# EAGLE board Lynx Disk Controller 10B (EAGLE 7.5.0)
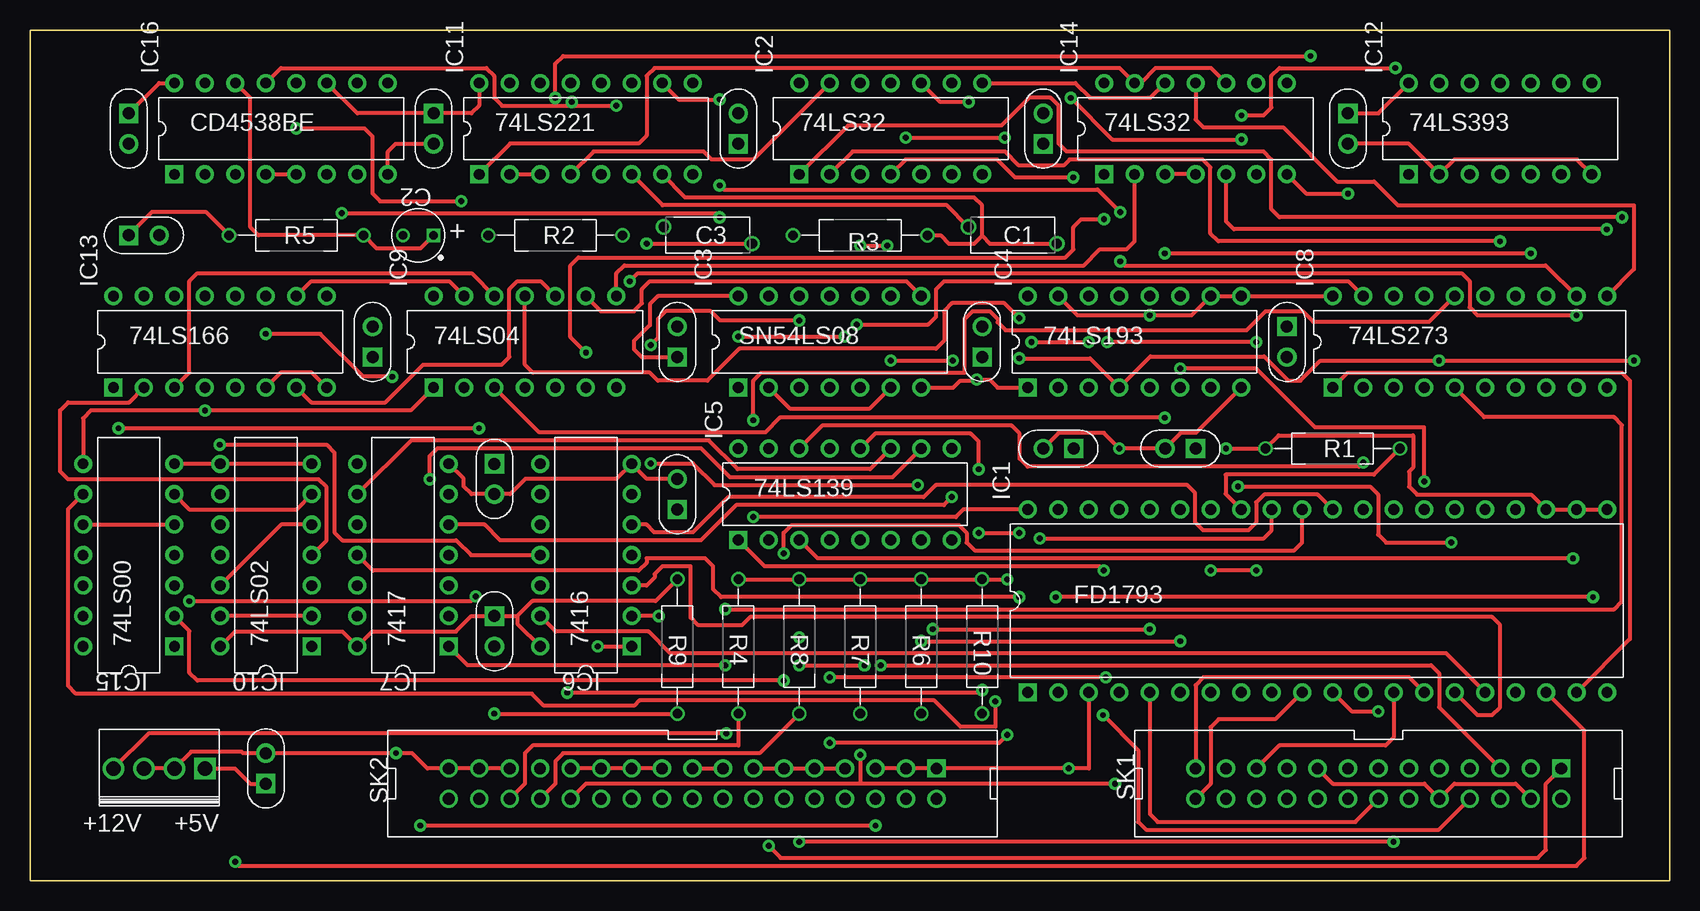
[diagram p0: board, top side]
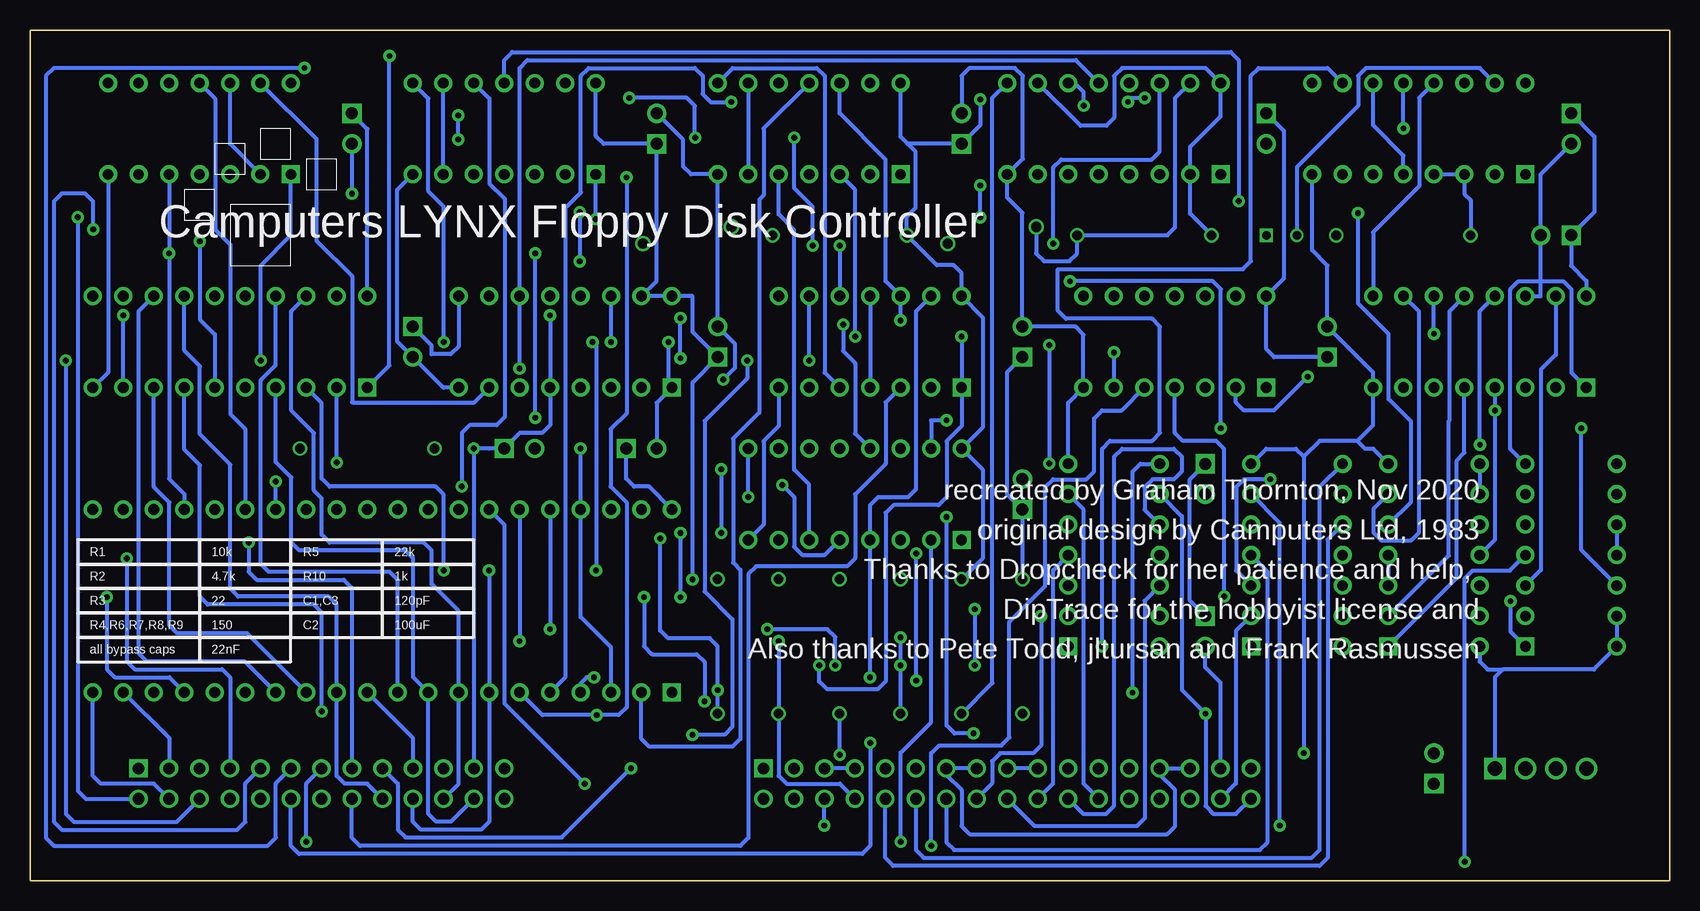
[diagram p1: board, bottom side, seen from below]

Size 136.65 x 70.95 mm. Coordinates in mm from the lower left corner, seen from the top.
Outline: 0,70.95 136.65,70.95 136.65,0 0,0 0,70.95
Copper layers (1*16): Top 0.035mm / dielectric 1.5mm / Bottom 0.035mm
Design rules "default *": minimum track width 10mil, minimum drill 0.61mm, track to track 8mil, track to pad 8mil, pad to pad 8mil, via to via 8mil, smd to smd 8mil, copper to edge 40mil, drill to drill 8mil, minimum pad ring 0mil, minimum via ring 8mil, stop-mask expansion 2mil, vias tented up to drill 19mil, thermal gap 10mil
Net classes: 0 Default: width 0.33 mm, clearance 0.33 mm

## Footprints (pad centres in the part's own frame; a part is rotated, then mirrored left to right if it is on the bottom)
CAPRB736W60L700T300H1000_AD2 = drill 0.85 pad 1.28: 1 -3.684,0.7; 2 3.684,-0.7
CAPPRD254W51D440H711 = drill 0.71 pad 1.11 square: 1 -1.27,0 | drill 0.71 pad 1.11: 2 1.27,0
CAP-2.54/6.6x3 = drill 1 pad 1.6 square: 1 -1.27,0 | drill 1 pad 1.6: 2 1.27,0
DIP-40/600mil = drill 0.9 pad 1.5 square: 1 -7.62,24.13 | drill 0.9 pad 1.5: 2 -7.62,21.59; 3 -7.62,19.05; 4 -7.62,16.51; 5 -7.62,13.97; 6 -7.62,11.43; 7 -7.62,8.89; 8 -7.62,6.35; 9 -7.62,3.81; 10 -7.62,1.27; 11 -7.62,-1.27; 12 -7.62,-3.81; 13 -7.62,-6.35; 14 -7.62,-8.89; 15 -7.62,-11.43; 16 -7.62,-13.97; 17 -7.62,-16.51; 18 -7.62,-19.05; 19 -7.62,-21.59; 20 -7.62,-24.13; 21 7.62,-24.13; 22 7.62,-21.59; 23 7.62,-19.05; 24 7.62,-16.51; 25 7.62,-13.97; 26 7.62,-11.43; 27 7.62,-8.89; 28 7.62,-6.35; 29 7.62,-3.81; 30 7.62,-1.27; 31 7.62,1.27; 32 7.62,3.81; 33 7.62,6.35; 34 7.62,8.89; 35 7.62,11.43; 36 7.62,13.97; 37 7.62,16.51; 38 7.62,19.05; 39 7.62,21.59; 40 7.62,24.13
DIP-14_IC9 = drill 0.9 pad 1.5 square: 1 -3.81,7.62 | drill 0.9 pad 1.5: 2 -3.81,5.08; 3 -3.81,2.54; 4 -3.81,0; 5 -3.81,-2.54; 6 -3.81,-5.08; 7 -3.81,-7.62; 8 3.81,-7.62; 9 3.81,-5.08; 10 3.81,-2.54; 11 3.81,0; 12 3.81,2.54; 13 3.81,5.08; 14 3.81,7.62
DIP-16 = drill 0.9 pad 1.5 square: 1 -3.81,8.89 | drill 0.9 pad 1.5: 2 -3.81,6.35; 3 -3.81,3.81; 4 -3.81,1.27; 5 -3.81,-1.27; 6 -3.81,-3.81; 7 -3.81,-6.35; 8 -3.81,-8.89; 9 3.81,-8.89; 10 3.81,-6.35; 11 3.81,-3.81; 12 3.81,-1.27; 13 3.81,1.27; 14 3.81,3.81; 15 3.81,6.35; 16 3.81,8.89
DIP-14 = drill 0.9 pad 1.5 square: 1 -3.81,7.62 | drill 0.9 pad 1.5: 2 -3.81,5.08; 3 -3.81,2.54; 4 -3.81,0; 5 -3.81,-2.54; 6 -3.81,-5.08; 7 -3.81,-7.62; 8 3.81,-7.62; 9 3.81,-5.08; 10 3.81,-2.54; 11 3.81,0; 12 3.81,2.54; 13 3.81,5.08; 14 3.81,7.62
DIP-20 = drill 0.9 pad 1.5 square: 1 -3.81,11.43 | drill 0.9 pad 1.5: 2 -3.81,8.89; 3 -3.81,6.35; 4 -3.81,3.81; 5 -3.81,1.27; 6 -3.81,-1.27; 7 -3.81,-3.81; 8 -3.81,-6.35; 9 -3.81,-8.89; 10 -3.81,-11.43; 11 3.81,-11.43; 12 3.81,-8.89; 13 3.81,-6.35; 14 3.81,-3.81; 15 3.81,-1.27; 16 3.81,1.27; 17 3.81,3.81; 18 3.81,6.35; 19 3.81,8.89; 20 3.81,11.43
22112042 = drill 1.2 pad 1.8 square: 1 -3.81,0 | drill 1.2 pad 1.8: 2 -1.27,0; 3 1.27,0; 4 3.81,0
RESAD1120W55L680D260 = drill 0.8 pad 1.2: 1 -5.6,0; 2 5.6,0
RESAD1120W55L680D260_R3 = drill 0.8 pad 1.2: 1 -5.6,0; 2 5.6,0
IDC26M = drill 0.965 pad 1.524 square: 1 15.24,1.27 | drill 0.965 pad 1.524: 2 15.24,-1.27; 3 12.7,1.27; 4 12.7,-1.27; 5 10.16,1.27; 6 10.16,-1.27; 7 7.62,1.27; 8 7.62,-1.27; 9 5.08,1.27; 10 5.08,-1.27; 11 2.54,1.27; 12 2.54,-1.27; 13 0,1.27; 14 0,-1.27; 15 -2.54,1.27; 16 -2.54,-1.27; 17 -5.08,1.27; 18 -5.08,-1.27; 19 -7.62,1.27; 20 -7.62,-1.27; 21 -10.16,1.27; 22 -10.16,-1.27; 23 -12.7,1.27; 24 -12.7,-1.27; 25 -15.24,1.27; 26 -15.24,-1.27
IDC34M = drill 0.965 pad 1.524 square: 1 20.32,1.27 | drill 0.965 pad 1.524: 2 20.32,-1.27; 3 17.78,1.27; 4 17.78,-1.27; 5 15.24,1.27; 6 15.24,-1.27; 7 12.7,1.27; 8 12.7,-1.27; 9 10.16,1.27; 10 10.16,-1.27; 11 7.62,1.27; 12 7.62,-1.27; 13 5.08,1.27; 14 5.08,-1.27; 15 2.54,1.27; 16 2.54,-1.27; 17 0,1.27; 18 0,-1.27; 19 -2.54,1.27; 20 -2.54,-1.27; 21 -5.08,1.27; 22 -5.08,-1.27; 23 -7.62,1.27; 24 -7.62,-1.27; 25 -10.16,1.27; 26 -10.16,-1.27; 27 -12.7,1.27; 28 -12.7,-1.27; 29 -15.24,1.27; 30 -15.24,-1.27; 31 -17.78,1.27; 32 -17.78,-1.27; 33 -20.32,1.27; 34 -20.32,-1.27

## Placement (x,y rotation side)
C1  HBZ820MBBCF0KR  [CAPRB736W60L700T300H1000_AD2]  81.89,53.83 0 top
C2  199D104X0035A1V1E3  [CAPPRD254W51D440H711]  32.36,53.83 180 top
C3  HBZ820MBBCF0KR  [CAPRB736W60L700T300H1000_AD2]  56.49,53.83 0 top
C4  CAP  [CAP-2.54/6.6x3]  19.66,9.38 90 top
C5  CAP  [CAP-2.54/6.6x3]  8.23,62.72 270 top
C6  CAP  [CAP-2.54/6.6x3]  33.63,62.72 270 top
C7  CAP  [CAP-2.54/6.6x3]  59.03,62.72 90 top
C8  CAP  [CAP-2.54/6.6x3]  84.43,62.72 90 top
C9  CAP  [CAP-2.54/6.6x3]  109.83,62.72 270 top
C10  CAP  [CAP-2.54/6.6x3]  104.75,44.94 270 top
C11  CAP  [CAP-2.54/6.6x3]  79.35,44.94 90 top
C12  CAP  [CAP-2.54/6.6x3]  53.95,44.94 90 top
C13  CAP  [CAP-2.54/6.6x3]  28.55,44.94 90 top
C14  CAP  [CAP-2.54/6.6x3]  9.5,53.83 0 top
C15  CAP  [CAP-2.54/6.6x3]  95.86,36.05 180 top
C16  CAP  [CAP-2.54/6.6x3]  38.71,33.51 270 top
C17  CAP  [CAP-2.54/6.6x3]  38.71,20.81 270 top
C18  CAP  [CAP-2.54/6.6x3]  53.95,32.24 90 top
C19  CAP  [CAP-2.54/6.6x3]  85.7,36.05 180 top
IC1  FD1793-02AL  [DIP-40/600mil]  107.29,23.35 90 top
IC2  SN74LS32N  [DIP-14_IC9]  71.73,62.72 90 top
IC3  SN74LS08N  [DIP-14_IC9]  66.65,44.94 90 top
IC4  SN74LS193N  [DIP-16]  92.05,44.94 90 top
IC5  SN74LS139N  [DIP-16]  67.92,32.24 90 top
IC6  DM7416N  [DIP-14]  46.33,27.16 180 top
IC7  SN7417N  [DIP-14]  31.09,27.16 180 top
IC8  SN74LS273N  [DIP-20]  119.99,44.94 90 top
IC9  SN74LS04N  [DIP-14_IC9]  41.25,44.94 90 top
IC10  SN74LS02N  [DIP-14]  19.66,27.16 180 top
IC11  SN74LS221N  [DIP-16]  46.33,62.72 90 top
IC12  SN74LS393N  [DIP-14_IC9]  122.53,62.72 90 top
IC13  DM74LS166N  [DIP-16]  15.85,44.94 90 top
IC14  SN74LS32N  [DIP-14_IC9]  97.13,62.72 90 top
IC15  SN74LS00N  [DIP-14]  8.23,27.16 180 top
IC16  MC14538BCP  [DIP-16]  20.93,62.72 90 top
PWR  22112042  [22112042]  10.77,9.38 180 top
R1  CFR-25JB-52-1K  [RESAD1120W55L680D260]  108.56,36.05 0 top
R2  CFR-25JB-52-1K  [RESAD1120W55L680D260]  43.79,53.83 0 top
R3  CFR-25JB-52-1K  [RESAD1120W55L680D260_R3]  69.19,53.83 180 top
R4  CFR-25JB-52-1K  [RESAD1120W55L680D260]  59.03,19.54 270 top
R5  CFR-25JB-52-1K  [RESAD1120W55L680D260]  22.2,53.83 0 top
R6  CFR-25JB-52-1K  [RESAD1120W55L680D260]  74.27,19.54 270 top
R7  CFR-25JB-52-1K  [RESAD1120W55L680D260]  69.19,19.54 270 top
R8  CFR-25JB-52-1K  [RESAD1120W55L680D260]  64.11,19.54 270 top
R9  CFR-25JB-52-1K  [RESAD1120W55L680D260]  53.95,19.54 270 top
R10  CFR-25JB-52-1K  [RESAD1120W55L680D260]  79.35,19.54 270 top
SK1  IDC2X13M  [IDC26M]  112.37,8.11 0 top
SK2  IDC2X17M  [IDC34M]  55.22,8.11 0 top

## Library data of the parts
C1 C3 = common; DATASHEET: http://datasheets.diptrace.com/vishay/HBZ.pdf; MANUFACTURER: Vishay; PART_NUMBER_(DIGI-KEY): HBZ820MBBCF0KR-ND; UNIQUE_NAME: VISHAY_HBZ_7.5X1.4_7X3_CAP
C2 = common; DATASHEET: http://datasheets.diptrace.com/vishay/199D.pdf; MANUFACTURER: Vishay; PART_NUMBER_(DIGI-KEY): 199D104X0035A1V1E3-ND; UNIQUE_NAME: VISHAY_199D_A1_CAPP
C4-C19 PWR SK1 SK2 = common
IC1 = common; MANUFACTURER: Western Digital
IC2 IC14 = common; DATASHEET: http://datasheets.diptrace.com/ti/SN5432.pdf; MANUFACTURER: Texas Instruments
IC3 = common; DATASHEET: http://datasheets.diptrace.com/ti/SN5408.pdf; MANUFACTURER: Texas Instruments
IC4 IC5 IC8 IC12 IC16 = common; MANUFACTURER: ON Semiconductor
IC6 = common; DATASHEET: http://datasheets.diptrace.com/fairchild/DM7416.pdf; MANUFACTURER: Fairchild
IC7 = common; DATASHEET: http://datasheets.diptrace.com/ti/SN5407_5417.pdf; MANUFACTURER: Texas Instruments
IC9 = common; MANUFACTURER: Motorola
IC10 = common; DATASHEET: http://datasheets.diptrace.com/ti/SN5402.pdf; MANUFACTURER: Texas Instruments
IC11 = common; DATASHEET: http://datasheets.diptrace.com/ti/SN54221.pdf; MANUFACTURER: Texas Instruments
IC13 = common; DATASHEET: http://datasheets.diptrace.com/fairchild/DM74LS166.pdf; MANUFACTURER: Fairchild
IC15 = common; DATASHEET: http://datasheets.diptrace.com/ti/SN5400.pdf; MANUFACTURER: Texas Instruments
R1-R10 = common; DATASHEET: http://datasheets.diptrace.com/yageo/cfr.pdf; MANUFACTURER: Yageo; PART_NUMBER_(DIGI-KEY): 1.0KQBK-ND; UNIQUE_NAME: YAGEO_CFR-25

## Nets
Net_0: IC6.1 IC16.10
Net_1: IC8.9 IC15.12
Net_2: IC15.5 IC15.10 IC15.11
Net_3: C4.1 C5.1 C6.1 C7.1 C8.1 C9.1 C10.1 C11.1 C12.1 C13.1 C14.1 C15.1 C16.1 C17.1 C18.1 IC1.21 IC1.22 IC1.23 IC2.14 IC3.14 IC4.5 IC4.9 IC4.10 IC4.15 IC4.16 IC5.16 IC6.14 IC7.14 IC8.20 IC9.14 IC10.14 IC11.2 IC11.3 IC11.10 IC11.16 IC12.14 IC13.16 IC14.14 IC15.13 IC15.14 IC16.3 IC16.4 IC16.5 IC16.11 IC16.16 PWR.1 R1.1 R2.1 R3.2 R4.1 R5.1 R6.1 R7.1 R8.1 R9.1 R10.1 SK1.23
Net_4: IC2.2 IC8.6
Net_5: C2.1 IC16.14 R5.2
Net_6: IC1.19 IC8.1 IC11.11 IC13.9 IC16.13 SK1.3
Net_7: IC8.11 IC14.11 IC16.12
Net_8: IC2.3 IC3.1 SK1.5
Net_9: IC2.13 IC11.4
Net_10: IC11.1 IC14.10 IC14.13 SK1.15
Net_11: IC2.8 IC3.5 IC14.12
Net_12: IC9.4 IC15.1
Net_13: IC2.12 IC3.12 IC5.5
Net_14: IC9.13 IC10.6 IC13.10 IC15.6
Net_15: C4.2 C5.2 C6.2 C7.2 C8.2 C9.2 C10.2 C11.2 C12.2 C13.2 C14.2 C15.2 C16.2 C17.2 C18.2 C19.2 IC1.3 IC1.20 IC1.37 IC2.7 IC3.7 IC4.1 IC4.8 IC4.14 IC5.8 IC6.7 IC7.7 IC8.10 IC9.7 IC10.7 IC10.8 IC10.9 IC11.8 IC12.2 IC12.7 IC12.12 IC13.1 IC13.6 IC13.8 IC13.14 IC14.7 IC15.7 IC16.8 PWR.2 PWR.3 SK1.4 SK1.10 SK1.17 SK2.1 SK2.3 SK2.5 SK2.7 SK2.9 SK2.11 SK2.13 SK2.15 SK2.17 SK2.19 SK2.21 SK2.23 SK2.25 SK2.27 SK2.29 SK2.31 SK2.33
Net_16: IC9.1 IC10.11 IC13.4 IC15.8
Net_17: C1.2 IC11.7 R3.1
Net_18: IC1.6 IC2.4 SK1.8
Net_19: IC2.6 IC2.9
Net_20: IC3.8 IC9.9
Net_21: IC9.6 IC14.1
Net_22: IC9.8 IC14.2
Net_23: IC14.3 IC14.4
Net_24: IC14.6 IC14.9
Net_25: IC5.1 IC14.8
Net_26: IC4.4 IC9.11 IC12.1 SK1.6
Net_27: IC5.14 IC8.2
Net_28: IC10.1 IC13.5
Net_29: IC1.4 IC3.13 IC5.4
Net_30: IC10.3 IC10.4 IC13.2
Net_31: IC8.12 IC10.5 IC10.12
Net_32: IC9.12 IC13.3
Net_33: IC9.10 IC13.7
Net_34: IC9.2 IC13.11
Net_35: IC3.2 IC3.6
Net_36: IC3.4 IC3.11
Net_37: IC7.1 IC8.5
Net_38: IC5.15 IC8.16
Net_39: IC5.13 IC8.19
Net_40: IC5.10 IC7.3
Net_41: IC5.9 IC7.5
Net_42: IC5.11 IC7.9
Net_43: IC5.12 IC7.11
Net_44: C1.1 IC11.6
Net_45: C3.1 IC11.15 R2.2
Net_46: C3.2 IC11.14
Net_47: IC10.2 IC10.13 IC13.12
Net_48: IC1.32 IC6.8 R10.2
Net_49: IC1.27 IC4.11 IC11.12
Net_50: IC4.7 IC12.13
Net_51: IC13.15 IC15.3
Net_52: IC1.26 IC12.11
Net_53: IC1.5 IC2.10 SK1.14
Net_54: IC3.3 SK1.16
Net_55: IC1.7 IC8.3 SK1.20
Net_56: IC1.8 IC8.18 SK1.22
Net_57: IC1.9 IC8.4 SK1.24
Net_58: IC1.10 IC8.17 SK1.26
Net_59: IC1.11 IC8.7 SK1.19
Net_60: IC1.12 IC8.14 SK1.18
Net_61: IC1.13 IC8.8 SK1.21
Net_62: IC5.2 SK1.13
Net_63: IC1.15 IC6.3
Net_64: IC1.16 IC6.13
Net_65: IC1.18 IC15.4
Net_66: IC1.17 IC15.9
Net_67: IC6.11 IC13.13
Net_68: IC1.24 IC9.3 IC12.5
Net_69: IC1.30 IC6.5
Net_70: IC1.31 IC15.2
Net_71: IC1.33 R1.2
Net_72: IC1.34 R7.2 SK2.26
Net_73: IC1.35 R6.2 SK2.8
Net_74: IC1.36 R8.2 SK2.28
Net_75: C19.1 IC1.40 PWR.4
Net_76: IC14.5 SK1.9
Net_77: IC11.9 R4.2 SK2.30
Net_78: IC9.5 SK1.1
Net_79: IC7.2 SK2.32
Net_80: IC7.4 SK2.14
Net_81: IC7.6 SK2.6
Net_82: IC7.10 SK2.10
Net_83: IC6.2 SK2.16
Net_84: IC6.4 SK2.20
Net_85: IC6.6 SK2.24
Net_86: IC6.9 R9.2 SK2.34
Net_87: IC6.10 SK2.22
Net_88: IC6.12 SK2.18
Net_89: IC5.3 SK1.7
Net_90: IC3.9 SK1.12
Net_91: IC3.10 SK1.11
Net_92: IC1.14 IC8.13 SK1.25
Net_93: IC2.1 SK1.2
Net_94: IC7.8 SK2.12
Net_95: IC2.5 IC5.6
Net_96: IC1.2 IC2.11
Net_97: C2.2 IC16.15

## Tracks (layer width: path | path; a pad name or v marks a point on that pad's centre or on a via)
Net_0  (via drill 0.49 pad 1.02)
  Top 0.33: v47.32,19.54 IC6.1
  Bottom 0.33: v47.32,19.54 47.32,36.03 46.66,36.69 43.15,36.69 42.49,37.35 42.49,46.21 43.15,46.87 50.33,46.87 50.99,47.53 50.99,51 35.58,51 34.92,51.66 34.92,67.12 34.26,67.78 28.52,67.78 IC16.10
Net_1  (via drill 0.49 pad 1.02)
  Top 0.33: v49.99,50 50.65,50.66 119.3,50.66 119.96,50 119.96,47.82 120.62,47.16 v128.88,47.16 | v7.38,37.74 v37.41,37.74
  Bottom 0.33: IC8.9 v128.88,47.16 | v37.41,37.74 37.41,49.34 38.07,50 v49.99,50 | IC15.12 7.38,27.58 v7.38,37.74
Net_2
  Top 0.33: IC15.10 IC15.5
  Bottom 0.33: IC15.10 IC15.11
Net_3  (via drill 0.49 pad 1.02)
  Top 0.33: v99.67,36.05 R1.1 104.05,37.15 115.25,37.15 115.25,34.46 114.93,34.14 114.93,32.88 115.59,32.22 125.09,32.22 IC1.23 IC1.22 IC1.21 | R9.1 52.13,23.33 41.86,23.33 40.61,22.08 | 40.61,22.08 40.61,21.45 IC6.14 | IC3.14 52.31,48.75 51.65,48.09 51.65,46.34 50.33,45.02 50.33,44.33 50.99,43.67 C12.1 | IC11.16 37.44,64.65 36.78,63.99 C6.1 27.28,63.99 IC16.11 | IC10.14 17.09,20.79 26.03,20.79 IC7.14 28.52,20.79 35.49,20.79 36.79,22.08 C17.1 40.61,22.08 | C9.1 112.37,63.99 IC12.14 | IC4.15 87.28,47.16 v93.32,47.16 96.81,47.16 IC4.10 IC4.9 IC8.20 | C5.1 10.77,66.53 IC16.16 | PWR.1 17.07,9.38 18.34,8.11 C4.1 | C14.1 10.18,55.79 14.64,55.79 R5.1 | IC11.10 54.06,65.15 v57.47,65.15 | R4.1 R8.1 R7.1 R6.1 R10.1 v81.45,25.14 | IC11.2 IC11.3 | IC16.4 IC16.5
  Bottom 0.33: IC15.13 IC15.14 6.32,17.64 13.92,17.64 | v81.45,25.14 81.45,41.57 C11.1 81.45,45.77 81.45,48.75 IC4.16 IC4.15 84.43,50.02 C8.1 88.85,61.45 89.51,62.11 IC14.14 | R4.1 57.22,26.95 57.22,34.25 IC5.16 57.22,37.86 57.22,46.95 IC3.14 59.03,50.68 59.69,51.34 61.09,51.34 R3.2 63.59,55.4 62.86,56.13 62.86,60.79 63.52,61.45 | C13.1 32.97,43.67 33.63,44.33 IC9.14 32.14,50.24 32.14,62.5 C6.1 | IC16.5 22.2,60.47 24.74,63.01 IC16.11 | R2.1 39.98,55.62 IC11.2 39.98,61.22 37.44,63.76 IC11.16 38.68,67.78 45.64,67.78 46.3,67.12 46.3,63.62 46.96,62.96 49.11,62.96 IC11.10 | v93.32,47.16 IC4.5 93.32,38.01 93.98,37.35 95.83,37.35 C15.1 98.42,36.05 | IC8.20 108.56,54.61 108.53,54.64 108.53,62.7 C9.1 | IC4.9 100.94,44.57 101.6,43.91 103.19,43.91 103.19,44.65 C10.1 | C5.1 6.3,62.06 6.3,55.76 C14.1 8.23,51.29 6.96,50.02 IC13.16 | IC16.4 IC16.3 17.12,57.27 16.6,56.75 R5.1 | 13.92,17.64 14.58,16.98 PWR.1 | C12.1 55.24,42.38 55.24,32.27 C18.1 R9.1 | C17.1 40,23.38 40,33.49 C16.1 | v57.47,65.15 57.47,63.01 C7.1 63.52,61.45 | IC10.14 15.85,18.3 15.19,17.64 13.92,17.64 | 63.52,61.45 64.11,62.04 IC2.14 | SK1.23 v99.67,36.05 98.42,36.05 | 98.42,36.05
Net_4  (via drill 0.49 pad 1.02)
  Top 0.33: v122.5,53.33 99.03,53.33 98.37,53.98 98.37,59.5 97.71,60.16 86.63,60.16 86.13,59.66 82.42,59.66 81.25,60.82 68.55,60.82 IC2.2
  Bottom 0.33: v122.5,53.33 122.5,46.81 121.26,45.56 IC8.6
Net_5
  Top 0.33: C2.1 32.53,52.74 28.89,52.74 R5.2 19.02,53.83 18.36,54.49 18.36,65.29 IC16.14
Net_6  (via drill 0.49 pad 1.02)
  Top 0.33: IC8.1 109.8,42.38 132.66,42.38 133.32,41.72 133.32,20.18 IC1.19 | v43.76,65.29 43.76,68.12 44.42,68.78 v106.7,68.78 | IC16.13 20.9,67.78 38.02,67.78 38.68,67.12 38.68,65.29 39.34,64.63 44.84,64.63 v45.16,64.94 | v45.16,64.94 45.48,64.63 v48.84,64.63 | v45.16,64.94 | v45.16,64.94
  Bottom 0.33: IC16.13 20.9,65.29 20.9,57.93 24.74,54.09 IC13.9 | IC8.1 106.7,42.99 v106.7,68.78 | v45.16,64.94 | IC1.19 125.07,11.92 SK1.3 | v48.84,64.63 48.84,65.78 49.59,66.53 IC11.11 | v45.16,64.94 44.81,65.29 v43.76,65.29 | IC11.11
Net_7  (via drill 0.49 pad 1.02)
  Top 0.33: IC14.11 97.13,63.48 97.79,62.82 104.42,62.82 108.93,58.32 112.01,58.32 113.99,56.34 133.67,56.34 133.67,51 IC8.11 | v22.2,62.75 27.86,62.75 28.52,62.09 28.52,57.33 29.18,56.67 v35.93,56.67
  Bottom 0.33: IC14.11 97.13,68.44 96.47,69.1 36.59,69.1 35.93,68.44 v35.93,56.67 | v22.2,62.75 IC16.12
Net_8  (via drill 0.49 pad 1.02)
  Top 0.33: v70.89,17.98 116.76,17.98 117.42,17.32 117.42,14.49 SK1.5 | v59.03,45.39 v67.89,45.39
  Bottom 0.33: v59.03,45.39 IC3.1 59.03,37.92 60.27,36.68 60.27,32 60.93,31.34 64.69,31.34 65.35,30.68 65.35,16.63 66.01,15.97 70.23,15.97 70.89,16.63 v70.89,17.98 | v67.89,45.39 67.89,57.62 IC2.3
Net_9
  Top 0.33: IC2.13 60.27,60.16 56.79,60.16 56.13,60.82 46.96,60.82 IC11.4
Net_10  (via drill 0.49 pad 1.02)
  Top 0.33: IC14.10 98.42,67.78 93.79,67.78 92.54,66.53 IC14.13 | v100.67,32.88 111.68,32.88 112.34,32.22 112.34,28.88 113,28.22 v118.43,28.22 | IC14.13 90.8,67.78 52.04,67.78 51.38,67.12 51.38,62.14 50.72,61.48 40,61.48 IC11.1 | IC14.13
  Bottom 0.33: v118.43,28.22 118.43,25.76 117.77,25.1 110.49,25.1 109.83,24.44 SK1.15 | IC14.10 98.37,65.24 98.37,58.15 97.1,56.88 97.1,38.67 97.76,38.01 100.01,38.01 100.67,37.35 v100.67,32.88
Net_11
  Top 0.33: IC2.8 87.11,66.53 88.35,65.29 93.34,65.29 IC14.12
  Bottom 0.33: IC2.8 78.1,67.78 71.09,67.78 70.43,67.12 70.43,42.38 IC3.5
Net_12  (via drill 0.49 pad 1.02)
  Top 0.33: v13.28,23.33 36.75,23.33 v37.15,23.72
  Bottom 0.33: v37.15,23.72 37.15,36.03 37.81,36.69 40.59,36.69 41.25,37.35 IC9.4 | v13.28,23.33 13.28,20.79 IC15.1
Net_13  (via drill 0.49 pad 1.02)
  Top 0.33: v51.73,34.81 55.24,34.81 57.05,33.01 v73.98,33.01 | v64.11,46.73 57.51,46.73 56.73,47.51 52.98,47.51 52.31,46.85 52.31,45.26 v51.73,44.68
  Bottom 0.33: v64.11,46.73 IC3.12 65.35,50 65.35,60.16 69.19,63.99 IC2.12 | v73.98,33.01 72.97,32 72.97,27.85 72.31,27.19 70.43,27.19 IC5.5 | v51.73,44.68 v51.73,34.81
Net_14
  Top 0.33: IC13.10 23.44,50 34.92,50 IC9.13 | IC10.6 22.17,30.95 13.33,30.95 IC15.6
  Bottom 0.33: IC10.6 24.71,31 24.71,29.07 24.05,28.41 21.56,28.41 20.9,29.07 20.9,47.46 IC13.10
Net_15  (via drill 0.49 pad 1.02)
  Top 0.33: IC4.8 97.15,37.35 95.88,37.35 C15.2 v90.78,36.05 89.48,37.35 85.72,37.35 C19.2 | IC12.7 128.9,60.16 118.69,60.16 IC12.2 114.91,61.45 C9.2 | C18.2 51.41,33.51 IC6.7 48.87,33.51 41.27,33.51 40,32.24 C16.2 36.8,32.24 36.14,32.9 36.14,33.54 IC7.7 | SK1.17 108.57,8.1 116.19,8.1 SK1.10 118.7,8.1 123.81,8.1 SK1.4 | IC16.8 29.82,60.79 30.48,61.45 C6.2 | SK2.29 SK2.31 SK2.33 33.12,9.38 31.85,10.65 v30.5,10.65 C4.2 17.76,10.65 17.64,10.78 13.43,10.78 PWR.2 PWR.3 | IC1.3 88.24,9.38 v86.57,9.38 SK2.1 SK2.3 SK2.5 | IC10.7 IC10.8 IC15.7 | IC13.8 23.49,42.38 20.9,42.38 IC13.6 | IC3.7 76.94,41.13 77.52,41.72 78.82,41.72 v78.89,41.79 | v83.45,44.92 v88.24,44.92 | SK2.13 SK2.11 SK2.9 SK2.7 | SK2.19 SK2.21 SK2.23 SK2.25 | SK2.17 SK2.15 | IC14.7 106.35,57.31 v109.83,57.31 | v78.89,41.79 79.98,41.79 80.64,41.13 IC4.1 | v78.89,41.79
  Bottom 0.33: SK1.4 126.32,8.1 130.76,8.1 131.42,8.76 IC1.20 | IC1.3 88.24,19.47 90.78,22.01 IC1.37 v90.78,36.05 | IC13.14 10.77,48.75 10.77,50 | 10.77,50 8.86,50 8.2,49.34 8.2,42.38 IC13.1 | IC3.7 74.27,37.92 75.51,36.68 75.51,29.73 IC5.8 | v78.89,41.79 77.89,42.8 77.89,44.75 C11.2 IC2.7 81.57,58.91 82.23,59.57 82.23,61.8 C8.2 | IC6.7 50.14,39.86 IC9.7 48.87,45.55 49.53,46.21 C12.2 53.95,55.71 55.22,56.98 IC11.8 53.92,60.21 53.92,67.12 54.58,67.78 58.37,67.78 59.03,67.12 C7.2 | IC12.7 130.15,42.4 IC8.10 | IC12.2 119.99,61.45 IC12.12 | IC15.7 13.28,36.03 13.28,49.34 12.62,50 10.77,50 | IC10.7 24.71,36.03 25.4,36.03 26.06,36.69 | 26.06,36.69 24.74,38.01 IC13.8 24.74,42.4 C13.2 28.55,51.31 29.82,52.58 IC16.8 | SK2.31 37.44,16.51 38.71,17.78 C17.2 | IC4.8 102.21,41.13 C10.2 106.04,44.97 106.04,57.62 IC14.7 | IC7.7 33.65,36.03 31.16,36.03 30.5,35.37 | 30.5,35.37 v30.5,10.65 | v83.45,44.92 83.45,41.43 IC4.1 | SK1.17 106,8.1 106,4.28 105.34,3.62 92.34,3.62 v86.57,9.38 | SK2.15 SK2.13 | 26.06,36.69 29.18,36.69 30.5,35.37 | v88.24,44.92 IC4.14 | SK2.19 SK2.17 | SK2.7 SK2.5 | IC10.8 IC10.9 | C9.2 v109.83,57.31 | C5.2 10.77,58.91 C14.2 10.77,50 | IC4.1 84.43,39.86 C19.2 | IC4.1 | SK2.27 SK2.29 | SK2.27 | SK2.13 60.3,8.86 59.01,7.58 59.01,4.56 58.35,3.9 41.89,3.9 41.23,4.56 41.23,7.58 42.52,8.86 SK2.27 | SK2.13
Net_16  (via drill 0.49 pad 1.02)
  Top 0.33: IC9.1 31.72,39.23 v14.58,39.23 5.08,39.23 4.42,38.57 IC15.8
  Bottom 0.33: IC13.4 v14.58,39.23 14.58,28.43 IC10.11
Net_17
  Top 0.33: R3.1 75.88,53.83 76.58,53.13 78.68,53.13 79.34,53.79 | 79.34,53.79 79.34,56.33 78.68,56.99 54.6,56.99 IC11.7 | 79.34,53.79 80,53.13 C1.2
Net_18  (via drill 0.49 pad 1.02)
  Top 0.33: v89.42,13.83 92.34,10.9 92.34,4.93 93,4.27 117.41,4.27 SK1.8 | v86.94,58.65 82.1,58.65 80.59,60.16 72.97,60.16 IC2.4
  Bottom 0.33: v86.94,58.65 86.94,38.99 88.26,37.67 88.26,32.88 86.94,31.56 86.94,14.49 87.6,13.83 v89.42,13.83 93.95,13.83 IC1.6
Net_19
  Bottom 0.33: IC2.9 IC2.6
Net_20
  Top 0.33: IC9.9 47.57,47.51 50.33,47.51 50.99,48.17 50.99,49.34 51.65,50 73.02,50 IC3.8
Net_21  (via drill 0.49 pad 1.02)
  Top 0.33: v46.33,44.07 45.03,45.36 45.03,51.32 45.69,51.98 86.28,51.98 86.94,52.64 86.94,54.51 87.6,55.17 v89.51,55.17
  Bottom 0.33: v46.33,44.07 IC9.6 | v89.51,55.17 IC14.1
Net_22
  Top 0.33: IC9.8 48.87,50.66 49.53,51.32 87.82,51.32 89.16,52.66 91.39,52.66 92.05,53.33 IC14.2
Net_23
  Top 0.33: IC14.4 IC14.3
Net_24
  Bottom 0.33: IC14.6 IC14.9
Net_25  (via drill 0.49 pad 1.02)
  Top 0.33: v89.48,25.89 | v102.18,44.92 v89.77,44.92 | v89.48,25.89 89.14,26.24 61.22,26.24 IC5.1
  Bottom 0.33: v89.77,44.92 | v102.18,44.92 102.18,56.22 103.45,57.49 103.45,65.24 IC14.8 | v89.77,44.92 89.48,44.62 v89.48,25.89
Net_26  (via drill 0.49 pad 1.02)
  Top 0.33: v82.45,43.57 88.34,43.57 IC4.4 93.37,43.72 102.84,43.72 104.85,41.72 105.87,41.72 107.53,43.38 v117.42,43.38 v133.67,43.38 | v82.45,46.92 81.2,48.17 76.83,48.17 76.17,47.51 76.17,45.04 75.51,44.38 59.12,44.38 56.45,41.72 52.32,41.72 51.66,42.38 41.91,42.38 41.25,43.04 IC9.11
  Bottom 0.33: v117.42,43.38 117.42,51.31 114.91,53.83 IC12.1 | v82.45,43.57 v82.45,46.92 | v133.67,43.38 133.67,5.59 133,4.93 124.44,4.93 SK1.6
Net_27  (via drill 0.49 pad 1.02)
  Top 0.33: v111.1,34.88 | v111.1,34.88 110.75,34.54 83.13,34.54 82.47,35.2 82.47,37.3 81.81,37.96 66.01,37.96 IC5.14
  Bottom 0.33: v111.1,34.88 IC8.2
Net_28
  Bottom 0.33: IC10.1 17.75,25.26 17.75,35.07 17.12,35.71 IC13.5
Net_29  (via drill 0.49 pad 1.02)
  Top 0.33: v89.65,16.98 v66.65,16.98
  Bottom 0.33: v66.65,16.98 IC5.4 66.65,31.34 65.99,32 63.47,32 62.81,32.66 62.81,47.51 IC3.13 | v89.65,16.98 90.27,16.98 90.78,16.47 IC1.4 | IC1.4
Net_30
  Top 0.33: IC10.4 24.71,28.41 24.71,32.83 24.05,33.49 3.17,33.49 2.51,34.15 2.51,39.23 3.17,39.89 8.25,39.89 IC13.2
  Bottom 0.33: IC10.4 IC10.3
Net_31  (via drill 0.49 pad 1.02)
  Top 0.33: IC10.5 20.93,29.7 IC10.12 | v90.85,51.66 | v57.47,57.99 | v25.98,55.67 57.12,55.67 v57.47,55.32 | v90.85,51.66 91.2,51.32 126.31,51.32 IC8.12 | v57.47,57.99 57.81,57.65 88.97,57.65 v90.85,55.76 | v57.47,55.32
  Bottom 0.33: v90.85,55.76 v90.85,51.66 | v57.47,55.32 v57.47,57.99 | IC10.5 21.56,31.61 21.56,38.29 23.44,40.17 23.44,45.6 25.98,48.14 v25.98,55.67
Net_32
  Top 0.33: IC13.3 13.28,42.38 13.28,50 13.94,50.66 36.8,50.66 IC9.12
Net_33
  Top 0.33: IC13.7 23.44,39.89 29.61,39.89 32.76,43.04 39.29,43.04 39.95,43.7 39.95,49.34 40.61,50 42.54,50 IC9.10
Net_34  (via drill 0.49 pad 1.02)
  Top 0.33: v30.18,42.03 27.77,42.03 24.19,45.61 v19.66,45.61
  Bottom 0.33: v30.18,42.03 32.99,39.23 35.51,39.23 36.17,39.89 IC9.2 | v19.66,45.61 IC13.11
Net_35
  Top 0.33: IC3.2 63.29,39.41 70,39.41 IC3.6
Net_36
  Bottom 0.33: IC3.11 IC3.4
Net_37  (via drill 0.49 pad 1.02)
  Top 0.33: v57.93,17.98 36.46,17.98 IC7.1 | v57.93,22.65 132,22.65 132.66,23.32 132.66,38.01 132,38.67 121.18,38.67 IC8.5
  Bottom 0.33: v57.93,22.65 v57.93,17.98
Net_38  (via drill 0.49 pad 1.02)
  Top 0.33: v60.27,38.4 60.27,41.72 60.93,42.38 77.89,42.38 77.89,46.85 78.55,47.51 79.98,47.51 80.64,46.85 80.64,46.58 81.3,45.92 101.39,45.92 102.98,47.51 106.04,47.51 106.92,46.63 116.59,46.63 IC8.16
  Bottom 0.33: v60.27,38.4 61.57,38.4 IC5.15
Net_39  (via drill 0.49 pad 1.02)
  Top 0.33: v68.9,46.39 74.85,46.39 75.51,47.05 75.51,49.34 76.17,50 109.85,50 IC8.19
  Bottom 0.33: v68.9,46.39 68.9,44.18 67.89,43.18 67.89,37.3 IC5.13
Net_40  (via drill 0.49 pad 1.02)
  Top 0.33: v33.31,33.49 33.31,35.42 33.97,36.08 55.9,36.08 58.31,33.66 71.88,33.66 IC5.10
  Bottom 0.33: v33.31,33.49 35.48,33.49 36.14,32.83 36.14,25.87 IC7.3
Net_41  (via drill 0.49 pad 1.02)
  Top 0.33: v76.81,32 76.15,31.34 58.84,31.34 55.9,28.41 39.18,28.41 37.89,29.7 IC7.5
  Bottom 0.33: v76.81,32 IC5.9
Net_42
  Top 0.33: IC5.11 70,34.33 58.98,34.33 56.56,36.74 31.77,36.74 IC7.9
Net_43  (via drill 0.49 pad 1.02)
  Top 0.33: v82.45,23.66 57.59,23.66 56.93,24.32 56.93,26.24 56.27,26.9 51.38,26.9 51.38,26.53 50.72,25.87 28.57,25.87 IC7.11 | v79.06,29.02 v82.45,29.02 | v79.06,34.33 79.06,36.64 78.39,37.3 70.43,37.3 IC5.12
  Bottom 0.33: v82.45,29.02 v82.45,23.66 | v79.06,34.33 v79.06,29.02
Net_44
  Top 0.33: C1.1 76.41,56.33 52.72,56.33 IC11.6
Net_45
  Bottom 0.33: C3.1 52.8,52.32 52.14,51.66 50.05,51.66 49.39,52.32 R2.2 41.88,53.83 41.22,54.49 41.22,65.29 IC11.15
Net_46  (via drill 0.49 pad 1.02)
  Top 0.33: v51.38,53.13 C3.2
  Bottom 0.33: v51.38,53.13 51.38,59.5 50.72,60.16 43.18,60.16 42.52,60.82 IC11.14
Net_47
  Top 0.33: IC10.2 IC10.13
  Bottom 0.33: IC10.2 18.41,27.14 18.41,38.38 18.36,38.43 18.36,47.51 IC13.12
Net_48  (via drill 0.49 pad 1.02)
  Top 0.33: v79.35,15.91 | v84.14,28.56 102.82,28.56 103.48,29.22 IC1.32 | v79.35,15.91 79.13,15.7 v44.78,15.7
  Bottom 0.33: v44.78,15.7 44.78,34.12 44.12,34.78 IC6.8 | R10.2 v79.35,15.91 | v79.35,15.91 79.35,19.56 80.01,20.22 83.48,20.22 84.14,20.88 v84.14,28.56 | v79.35,15.91
Net_49  (via drill 0.49 pad 1.02)
  Top 0.33: v116.18,33.29 116.18,37.81 107.09,37.81 102.18,42.72 v95.86,42.72
  Bottom 0.33: v95.86,42.72 IC4.11 95.86,67.78 95.2,68.44 49.5,68.44 IC11.12 | IC1.27 v116.18,33.29
Net_50
  Bottom 0.33: IC12.13 112.78,61.87 112.78,53.4 109.8,50.42 109.8,39.89 99.64,39.89 IC4.7
Net_51
  Bottom 0.33: IC13.15 9.5,43.88 10.74,42.64 10.74,25.92 IC15.3
Net_52
  Bottom 0.33: IC12.11 121.23,65.24 121.23,54.3 119.96,53.03 119.96,38.93 118.72,37.68 IC1.26
Net_53  (via drill 0.49 pad 1.02)
  Top 0.33: IC1.5 93.32,5.59 93.98,4.93 110.45,4.93 SK1.14 | v78.22,64.94 75.86,64.94 IC2.10
  Bottom 0.33: IC1.5 92.02,17.03 92.02,56.13 90.75,57.4 90.75,67.12 90.09,67.78 81.25,67.78 80.59,67.12 80.59,65.6 79.93,64.94 v78.22,64.94
Net_54
  Bottom 0.33: IC3.3 65.35,39.89 65.35,34.77 67.89,32.23 67.89,26.9 68.55,26.24 76.13,26.24 76.79,25.58 76.79,3.58 77.45,2.92 109.17,2.92 109.83,3.58 SK1.16
Net_55  (via drill 0.49 pad 1.02)
  Top 0.33: v102.18,25.89 v98.4,25.89
  Bottom 0.33: v102.18,25.89 102.18,32.22 102.84,32.88 111.68,32.88 112.34,33.54 112.34,39.84 IC8.3 | SK1.20 104.75,4.94 104.09,4.28 99.06,4.28 98.4,4.94 IC1.7 v98.4,25.89
Net_56
  Bottom 0.33: SK1.22 100.94,8.11 IC1.8 100.94,22.51 103.19,24.76 103.19,27.56 103.85,28.22 111.68,28.22 112.34,28.88 112.34,31.89 113,32.55 113,37.34 114.88,39.22 114.88,47.51 IC8.18
Net_57
  Bottom 0.33: SK1.24 101.57,4.94 102.82,4.94 103.48,5.6 IC1.9 104.72,16.98 104.72,26.9 105.38,27.56 114.22,27.56 114.88,28.22 114.88,33.65 116.18,34.94 IC8.4
Net_58
  Top 0.33: IC1.10 103.77,13.48 99.05,13.48 98.38,12.82 98.38,8.1 SK1.26
  Bottom 0.33: IC1.10 106.02,25.1 106.68,25.76 116.76,25.76 117.42,26.43 117.42,41.76 116.18,43 IC8.17
Net_59  (via drill 0.49 pad 1.02)
  Top 0.33: IC1.11 110.14,14.14 v112.34,14.14
  Bottom 0.33: IC1.11 104.75,11.92 SK1.19 | v112.34,14.14 112.34,22.39 113,23.05 121.84,23.05 122.5,23.71 122.5,34.67 123.8,35.96 IC8.7
Net_60
  Bottom 0.33: SK1.18 108.54,8.1 110.44,8.1 111.1,8.76 IC1.12 111.1,23.05 111.76,23.71 119.3,23.71 119.96,24.37 119.96,34.7 122.5,37.24 122.5,42.92 123.8,44.21 IC8.14
Net_61
  Top 0.33: IC1.13 113.64,11.96 112.98,11.3 104.12,11.3 SK1.21
  Bottom 0.33: IC1.13 118.56,20.66 124.38,20.66 125.04,21.32 125.04,31.57 126.34,32.87 IC8.8
Net_62  (via drill 0.49 pad 1.02)
  Top 0.33: v113.62,3.26 v64.09,3.26
  Bottom 0.33: v64.09,3.26 64.09,10.7 61.57,13.22 IC5.2 | v113.62,3.26 113.62,8.12 SK1.13
Net_63
  Top 0.33: IC1.15 120.62,13.83 121.84,13.83 122.5,14.49 122.5,21.33 121.84,21.99 60.01,21.99 59.32,21.31 55.7,21.31 55.04,21.97 55.04,26.24 52.7,26.24 52.04,25.58 52.04,25.28 51.38,24.62 IC6.3
Net_64
  Top 0.33: IC1.16 118,18.98 53.36,18.98 51.55,20.79 43.81,20.79 IC6.13
Net_65  (via drill 0.49 pad 1.02)
  Top 0.33: v17.09,1.6 | v17.09,1.6 17.43,1.26 128.86,1.26 129.53,1.92 129.53,12.54 IC1.18
  Bottom 0.33: v17.09,1.6 17.09,25.21 16.43,25.87 13.33,25.87 IC15.4
Net_66  (via drill 0.49 pad 1.02)
  Top 0.33: v80.44,14.96 80.44,12.85 77.55,12.85 75.36,15.04 50.78,15.04 50.34,14.6 42.83,14.6 41.83,15.61 3.83,15.61 3.17,16.27 3.17,31 IC15.9 | v130.25,23.66 v85.48,23.66
  Bottom 0.33: v85.48,23.66 85.48,19.56 84.82,18.9 81.1,18.9 80.44,18.24 v80.44,14.96 | v130.25,23.66 130.25,17.64 129.59,16.98 125.04,16.98 IC1.17
Net_67  (via drill 0.49 pad 1.02)
  Top 0.33: v15.82,36.37 24.71,36.37 25.37,35.71 25.37,29.07 26.03,28.41 35.52,28.41 36.77,27.16 IC6.11
  Bottom 0.33: v15.82,36.37 15.82,47.51 IC13.13
Net_68  (via drill 0.49 pad 1.02)
  Top 0.33: v125.07,52.32 v94.56,52.32 | v94.56,38.62 62.5,38.62 61.28,37.4 42.44,37.4 IC9.3
  Bottom 0.33: IC12.5 v125.07,52.32 125.07,33.51 123.8,32.24 IC1.24 | v94.56,38.62 v94.56,52.32
Net_69
  Top 0.33: IC1.30 107.31,32.22 102.84,32.22 102.18,31.56 102.18,29.88 101.52,29.22 97.76,29.22 97.1,29.88 97.1,32.34 96.44,33.01 75.48,33.01 74.48,32 58.18,32 55.24,29.07 52.02,29.07 51.38,29.7 IC6.5
Net_70  (via drill 0.49 pad 1.02)
  Top 0.33: v62.81,27.31 62.81,29.02 63.47,29.68 77.39,29.68 78.05,29.02 78.05,28.22 78.71,27.56 105.36,27.56 106.02,28.22 IC1.31 | v62.81,16.7 13.94,16.7 13.28,17.36 13.28,20.84 IC15.2
  Bottom 0.33: v62.81,16.7 v62.81,27.31
Net_71
  Top 0.33: R1.2 111.99,33.88 99.64,33.88 99.64,32.27 IC1.33
Net_72  (via drill 0.49 pad 1.02)
  Top 0.33: v90.42,8.1 69.19,8.1 | 69.19,8.1 46.31,8.1 SK2.26 | v69.19,10.51 69.19,8.1
  Bottom 0.33: v90.42,8.1 97.1,14.78 97.1,29.68 IC1.34 | v69.19,10.51 R7.2
Net_73  (via drill 0.49 pad 1.02)
  Top 0.33: v74.27,19.99 v95.86,19.99
  Bottom 0.33: v74.27,19.99 R6.2 74.27,8.76 73.61,8.1 69.17,8.1 SK2.8 | IC1.35 v95.86,19.99
Net_74  (via drill 0.49 pad 1.02)
  Top 0.33: R8.2 60.8,10.64 44.44,10.64 43.77,9.98 43.77,8.1 SK2.28 | v75.22,20.99 v93.32,20.99 | v64.11,17.98 v69.55,17.98
  Bottom 0.33: IC1.36 v93.32,20.99 | v69.55,17.98 69.55,20.33 70.2,20.99 v75.22,20.99 | R8.2 v64.11,17.98 v64.11,20.3
Net_75  (via drill 0.49 pad 1.02)
  Top 0.33: IC1.40 77.78,30.97 77.15,30.34 v60.27,30.34 | v58.02,12.3 9.88,12.3 PWR.4
  Bottom 0.33: IC1.40 85.06,32.88 86.31,32.88 86.97,33.54 C19.1 | v58.02,12.3 59.61,12.3 60.27,12.96 v60.27,30.34
Net_76  (via drill 0.49 pad 1.02)
  Top 0.33: v131.39,54.33 100.33,54.33 99.67,54.99 IC14.5
  Bottom 0.33: v131.39,54.33 131.39,56.65 132.05,57.31 134.01,57.31 134.67,56.65 134.67,4.93 134.01,4.27 119.36,4.27 118.7,4.93 118.7,8.12 SK1.9
Net_77
  Top 0.33: R4.2 59.03,11.3 41.89,11.3 41.23,10.64 41.23,8.1 SK2.30
  Bottom 0.33: R4.2 56.46,16.51 56.46,65.29 IC11.9
Net_78  (via drill 0.49 pad 1.02)
  Top 0.33: v61.55,2.92 62.56,1.92 125.66,1.92 126.32,2.58 126.32,8.1 SK1.1
  Bottom 0.33: v61.55,2.92 61.55,10.64 60.89,11.3 55.7,11.3 55.04,11.96 55.04,21.59 52.05,24.58 52.05,32.83 51.39,33.49 48.64,33.49 47.98,34.15 47.98,38.57 47.32,39.23 45.69,39.23 IC9.5
Net_79
  Bottom 0.33: IC7.2 36.15,20.83 36.15,8.12 SK2.32
Net_80
  Bottom 0.33: SK2.14 60.3,3.24 59.64,2.58 34.17,2.58 33.51,3.24 33.51,25.78 IC7.4
Net_81  (via drill 0.49 pad 1.02)
  Top 0.33: v70.46,4.61 v32.51,4.61
  Bottom 0.33: v32.51,4.61 32.51,29.86 IC7.6 | v70.46,4.61 SK2.6
Net_82
  Bottom 0.33: IC7.10 28.52,28.46 28.52,1.92 29.18,1.26 64.72,1.26 65.38,1.92 SK2.10
Net_83  (via drill 0.49 pad 1.02)
  Top 0.33: v52.4,22.08 IC6.2
  Bottom 0.33: v52.4,22.08 52.4,11.3 53.06,10.64 55.81,10.64 56.47,9.98 56.47,8.12 SK2.16
Net_84
  Bottom 0.33: SK2.20 51.39,8.12 51.39,25.91 IC6.4
Net_85
  Bottom 0.33: SK2.24 48.85,8.1 48.85,30.96 IC6.6
Net_86  (via drill 0.49 pad 1.02)
  Top 0.33: v38.69,13.94 R9.2
  Bottom 0.33: IC6.9 40.66,30.39 40.66,15.91 v38.69,13.94 38.69,6.24 38.03,5.58 36.15,5.58 SK2.34
Net_87
  Bottom 0.33: SK2.22 48.88,5.58 46.98,5.58 46.31,6.24 46.31,35.37 45.65,36.03 41.32,36.03 40.66,35.37 40.66,34.15 41.32,33.49 43.1,33.49 43.76,32.83 43.76,30.95 IC6.10
Net_88
  Bottom 0.33: IC6.12 43.77,23.37 43.77,5.22 44.44,4.56 52.93,4.56 SK2.18
Net_89  (via drill 0.49 pad 1.02)
  Top 0.33: v128.59,26.9 65.64,26.9 IC5.3
  Bottom 0.33: v128.59,26.9 128.59,18.3 127.92,17.64 120.65,17.64 119.99,16.98 SK1.7
Net_90  (via drill 0.49 pad 1.02)
  Top 0.33: v81.45,12.19 80.76,11.5 v66.63,11.5 | v71.73,43.38 v76.89,43.38
  Bottom 0.33: v66.63,11.5 66.63,2.92 67.3,2.26 114.25,2.26 114.91,2.92 SK1.12 | v76.89,43.38 76.89,41.91 80.44,38.35 80.44,24.14 78.11,21.81 78.11,12.85 78.78,12.19 v81.45,12.19 | v71.73,43.38 IC3.9
Net_91  (via drill 0.49 pad 1.02)
  Top 0.33: v100.96,63.83 102.79,63.83 103.45,64.49 103.45,67.12 104.11,67.78 v113.78,67.78 | v86.73,65.29 90.19,61.82 v100.96,61.82 | v72.97,61.98 v81.23,61.98 | v69.19,52.98 v71.44,52.98
  Bottom 0.33: v113.78,67.78 134.67,67.78 135.33,67.12 135.33,3.61 134.67,2.95 116.83,2.95 116.16,3.61 116.16,8.12 SK1.11 | v100.96,61.82 v100.96,63.83 | v81.23,61.98 | v71.44,52.98 71.44,56.24 72.97,57.78 v72.97,61.98 | v69.19,52.98 IC3.10 | v81.23,61.98 81.25,62 81.25,64.63 81.91,65.29 v86.73,65.29
Net_92
  Top 0.33: IC1.14 114.93,16.98 97.79,16.98 97.13,16.32 SK1.25
  Bottom 0.33: IC1.14 118.74,18.3 126.92,18.3 127.58,18.96 127.58,47.51 IC8.13
Net_93  (via drill 0.49 pad 1.02)
  Top 0.33: v132.66,55.33 104.11,55.33 103.45,55.99 103.45,60.16 102.79,60.82 86.38,60.82 85.72,61.48 85.72,64.63 85.06,65.29 83.26,65.29 80.96,62.98 68.18,62.98 IC2.1
  Bottom 0.33: v132.66,55.33 132.66,7.5 132,6.84 SK1.2
Net_94
  Bottom 0.33: SK2.12 62.84,2.58 62.18,1.92 29.84,1.92 29.18,2.58 29.18,32.88 IC7.8
Net_95
  Bottom 0.33: IC5.6 71.73,33.04 72.97,34.29 72.97,54.28 74.27,55.58 IC2.5
Net_96
  Bottom 0.33: IC2.11 75.51,62.75 75.51,57.19 75.88,56.82 75.88,39.04 78.05,36.87 78.05,26.54 77.45,25.94 77.45,11.84 78.11,11.18 85.04,11.18 85.7,11.84 IC1.2
Net_97
  Bottom 0.33: IC16.15 15.82,67.78 25.32,67.78 25.98,67.12 25.98,64.63 31.09,59.52 C2.2

## Text on the board
tPlace: IC16 | IC11 | IC2 | IC14 | IC12 | CD4538BE | 74LS221 | 74LS32 | 74LS32 | 74LS393 | C2 | + | R5 | R2 | C3 | C1 | R3 | IC13 | IC9 | IC3 | IC4 | IC8 | 74LS166 | 74LS04 | SN54LS08 | 74LS193 | 74LS273 | IC5 | R1 | 74LS139 | IC1 | FD1793 | R9 | R4 | R8 | R7 | R6 | R10 | 74LS00 | 74LS02 | 7417 | 7416 | IC15 | IC10 | IC7 | IC6 | SK2 | SK1 | +12V | +5V
bPlace: Camputers LYNX Floppy Disk Controller | recreated by Graham Thornton, Nov 2020 / original design by Camputers Ltd, 1983 / Thanks to Dropcheck for her patience and help, / DipTrace for the hobbyist license and / Also thanks to Pete Todd, jltursan and Frank Rasmussen | 22k | R5 | 10k | R1 | 1k | R10 | 4.7k | R2 | 120pF | C1,C3 | 22 | R3 | 100uF | C2 | 150 | R4,R6,R7,R8,R9 | 22nF | all bypass caps